# Altium PCB pcb_j.PcbDoc
Units mm, origin at the board's own origin, x right, y up, seen from the top; angles counter-clockwise.
Board outline 38.48 x 42.55 mm, 2 copper layers (Top Layer, Bottom Layer); 15 components, 15 nets, 63 pads, 0 vias.
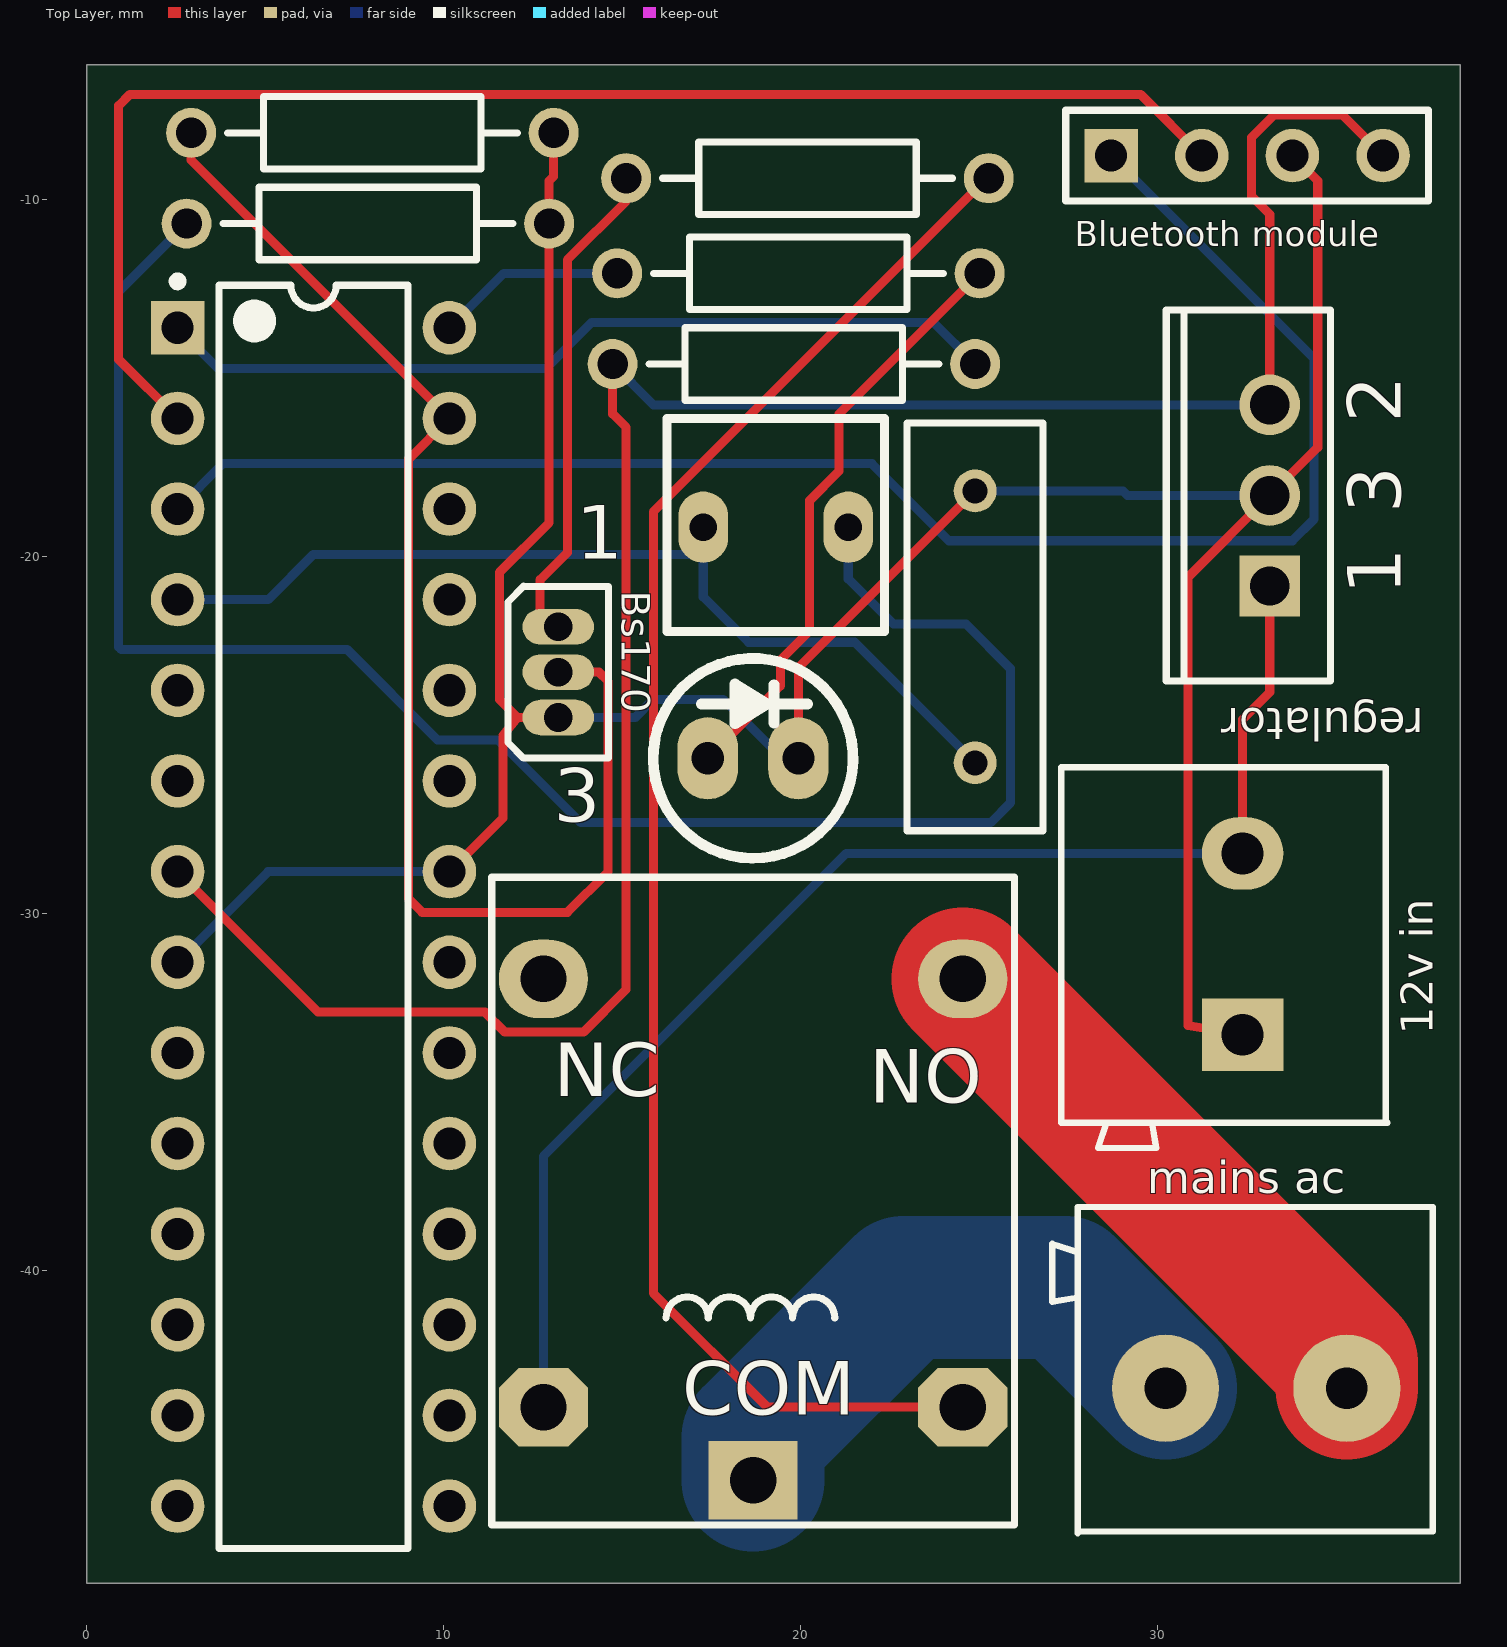
[diagram p0: Top Layer view]
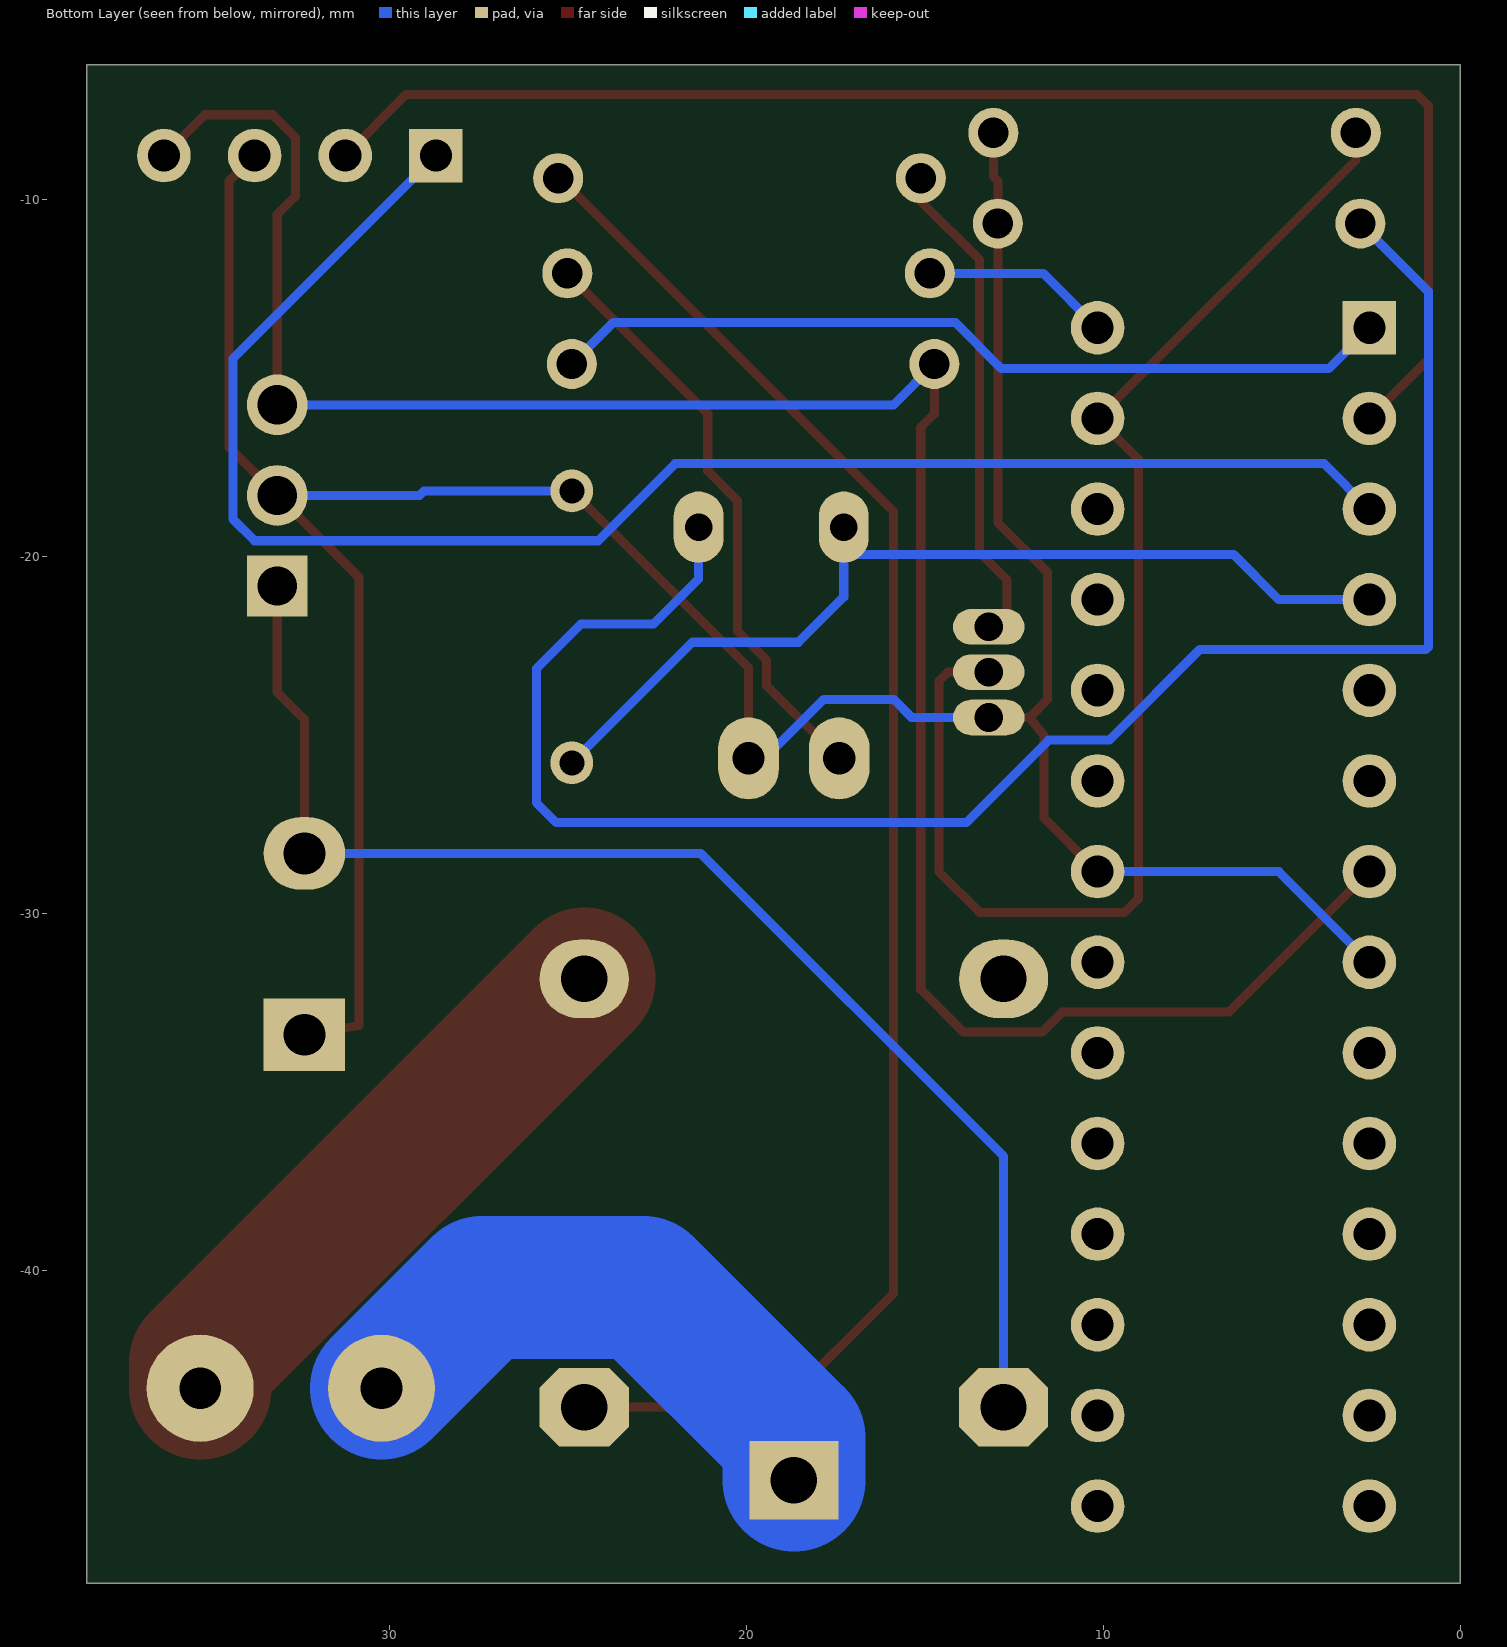
[diagram p1: Bottom Layer view, seen from below]

## Layer stack, top to bottom
Top Solder: solder mask 0.0102, Solder Resist, Dk 3.5
Top Layer: signal copper 0.0356
Dielectric 1: dielectric 0.32, FR-4, Dk 4.8
Bottom Layer: signal copper 0.0356
Bottom Solder: solder mask 0.0102, Solder Resist, Dk 3.5

## Board outline
0,-48.768 38.481,-48.768 38.481,-6.223 0,-6.223

## Design rules (kind name [scope] priority, off if disabled: settings)
Clearance [All] p1: gap=0.254 ignorepadtopadclearanceinfootprint=FALSE except(0: Arc-Hole Track-Hole SMDPad-Hole THPad-Hole Via-Hole Fill-Hole Poly-Hole Region-Hole Text-Hole)
PolygonConnect [All] p1: connectstyle=Relief reliefconductorwidth=0.254 reliefentries=4 polygonreliefangle="90 Angle" airgapwidth=0.254
RoutingVias [All] p1: holewidth=0.711 width=1.27 viastyle="Through Hole" minholewidth=0.711 minwidth=1.27 maxholewidth=0.711 maxwidth=1.27
SolderMaskExpansion [All] p1: expansion=0.102
Width Width_3 [InNet('Net5v_1')] p1: maxlimit=4 minlimit=4 preferedwidth=4
Width Width_2 [InNet('Net5v_3')] p2: maxlimit=4 minlimit=4 preferedwidth=4
Width Width_1 [All] p3: maxlimit=0.254 minlimit=0.254 preferedwidth=0.254
30 further rules are at their usual default settings.

## Classes and differential pairs
component class first_test: 5v "12v in" "Bluetooth module" Bs170 C? D1 "mains ac" R_led R_mosfet R_reset regulator S? U? ""

## Components (designator, comment, footprint, x,y, rotation, side; value= is the part's Value field where it differs from the comment)
5v "Relay" "Relay 18.85x15.35x15.70" 18.669,-38.862 r0 top
"12v in" "TBlock-2" "KF300-2 PIN"#1 32.385,-33.401 r180 top
"Bluetooth module" "Header 4" HDR1X4 28.702,-8.763 r0 top
Bs170 "MOSFET-N" E3 13.208,-23.241 r0 top (schematic designator IRF540)
C? "Cap" RAD-0.3 24.892,-21.971 r270 top value=100pF
D1 "LED2" LED_5MM 17.399,-25.654 r180 top
"mains ac" "TBlock-2" "KF300-2 PIN"#2 30.226,-43.307 r90 top
R__Button "Res2" AXIAL-0.4 7.874,-10.668 r180 top value=10k
R_led "Res2" AXIAL-0.4 19.939,-12.065 r180 top value=10K
R_mosfet "Res2" AXIAL-0.4 8.001,-8.128 r180 top value=10K
R_relay "Res2" AXIAL-0.4 20.193,-9.398 r0 top value=100
R_reset "Res2" AXIAL-0.4 19.812,-14.605 r180 top value=3.3K
regulator "L7805CV" TO220ABN 33.147,-18.288 r90 top
S? "PB-2pin" PB-2pin 22.352,-16.129 r180 top
U? "ATmega8A-PU" 28P3 6.35,-30.099 r0 top

## Footprints (in the part's own frame and the unit in brackets; to place one, negate y for a bottom-side part, rotate by r counter-clockwise, add the part's x,y. Pads: shape width x height; smd on the part's side, far side on the other; paste and mask are expansions set on the pad)
28P3 [mm] "DIP, 28-Leads, Row Spacing 7.62mm, Pitch 2.54mm, Body 34.67x7.3mm"
  rect 1.5x1.5 hole 0.9: 1(-3.81,16.51)
  round 1.5 hole 0.9: 2(-3.81,13.97) 3(-3.81,11.43) 4(-3.81,8.89) 5(-3.81,6.35) 6(-3.81,3.81) 7(-3.81,1.27) 8(-3.81,-1.27) 9(-3.81,-3.81) 10(-3.81,-6.35) 11(-3.81,-8.89) 12(-3.81,-11.43) 13(-3.81,-13.97) 14(-3.81,-16.51) 15(3.81,-16.51) 16(3.81,-13.97) 17(3.81,-11.43) 18(3.81,-8.89) 19(3.81,-6.35) 20(3.81,-3.81) 21(3.81,-1.27) 22(3.81,1.27) 23(3.81,3.81) 24(3.81,6.35) 25(3.81,8.89) 26(3.81,11.43) 27(3.81,13.97) 28(3.81,16.51)
  silkscreen extent -3.93,-17.7 2.65,17.93, body extent -3.6,-17.65 3.6,17.65, height 4.58
AXIAL-0.4 [mm] "Axial Device, Thru-Hole; 2 Leads; 0.4 in Pin Spacing"
  round 1.4 hole 0.85: 1(-5.08,0) 2(5.08,0)
  silkscreen extent -4.06,-1.02 4.06,1.02
E3 [mm] "TO, Flat Index; 3 In-Line, Axial Leads; Body Dia. 4.6mm; Lead Dia. 0.5 mm (max)"
  oval 2x1 hole 0.8: 1(0,1.27) 2(0,0) 3(0,-1.27)
  silkscreen extent -1.41,-2.41 1.41,2.41
HDR1X4 [mm] "Connector; Header; 4 Position"
  rect 1.5x1.5 hole 0.9: 1(0,0)
  round 1.5 hole 0.9: 2(2.54,0) 3(5.08,0) 4(7.62,0)
  silkscreen extent -1.27,-1.27 8.89,1.27
"KF300-2 PIN"#1 [mil]
  rect 90x80 hole 46: 1(0,0)
  oval 90x80 hole 46: 2(0,-200)
  silkscreen extent -160,-295 200,125, body extent -157,-295 200,127, height 493
"KF300-2 PIN"#2 [mil]
  round 118.11 hole 46: 1(0,0) 2(0,-200)
  silkscreen extent -160,-295 200,125, body extent -157,-295 200,127, height 493
LED_5MM [mm]
  oval 1.7x2.3 hole 0.9: 1(0,0) 2(-2.54,0)
  silkscreen extent -4.07,-2.8 1.53,2.8
PB-2pin [mil] "Switch"
  oval 55.12x78.74 hole 30: 1(40,120) 2(200,120)
  silkscreen extent 0,0 240,235
RAD-0.3 [mm] "Radial Cap, Thru-Hole; 2 Leads; 0.3 in Pin Spacing"
  round 1.2 hole 0.7: 1(-3.81,0) 2(3.81,0)
  silkscreen extent -5.71,-1.91 5.71,1.91
"Relay 18.85x15.35x15.70" [mm]
  rect 2.5x2.2 hole 1.3: 1(0,-7.025)
  oval 2.5x2.2 hole 1.3: 2(-5.875,7.025) 3(5.875,7.025)
  oct 2.5x2.2 hole 1.3: 4(-5.875,-4.975) 5(5.875,-4.975)
  silkscreen extent -7.33,-8.28 7.33,9.88, body extent -7.37,-8.71 7.63,9.98, height 15.7
TO220ABN [mm] "TO, Thru-Hole, Vertical, Heatsink Mounted; 3 In-Line Leads; Pitch 2.54 mm; Pin sequence 1, 3, 2"
  rect 1.7x1.7 hole 1.1: 1(-2.54,0)
  round 1.7 hole 1.1: 2(2.54,0) 3(0,0)
  silkscreen extent -5.2,-1.7 5.2,2.9

## Part data
5v: "SPDT Relay", Company=E.P.I.L, Design_Date=2011/10/31, Designer="Eng. Saeid Jorablo"
"Bluetooth module": "Header, 4-Pin", LatestRevisionDate=17-Jul-2002, LatestRevisionNote="Re-released for DXP Platform.", Publisher="Altium Limited"
Bs170: "N-Channel MOSFET", LatestRevisionDate=17-Jul-2002, LatestRevisionNote="Re-released for DXP Platform.", PackageDescription="TO, Flat Index; 3 In-Line, Axial Leads; Body Dia. 4.6mm; Lead Dia. 0.5 mm (max)", PackageReference=E3, PackageVersion=1995/1996, Published=8-Jun-2000, Publisher="Altium Limited"
C?: "Capacitor", LatestRevisionDate=17-Jul-2002, LatestRevisionNote="Re-released for DXP Platform.", PackageDescription="Radial Cap, Thru-Hole; 2 Leads; 0.3 in Pin Spacing", PackageReference=RAD-0.3, Published=8-Jun-2000, Publisher="Altium Limited"
D1: "Typical RED, GREEN, YELLOW, AMBER GaAs LED", LatestRevisionDate=17-Jul-2002, LatestRevisionNote="Re-released for DXP Platform.", PackageDescription="SM LED; 2 Flat Leads", PackageReference=3.2X1.6X1.1, PackageVersion=Feb-2002, Published=8-Jun-2000, Publisher="Altium Limited"
R__Button R_led R_mosfet R_relay R_reset: "Resistor", LatestRevisionDate=17-Jul-2002, LatestRevisionNote="Re-released for DXP Platform.", PackageDescription="Axial Device, Thru-Hole; 2 Leads; 0.4 in Pin Spacing", PackageReference=AXIAL-0.4, Published=8-Jun-2000, Publisher="Altium Limited"
regulator: "Positive Voltage Regulator", ComponentLink1Description="Manufacturer Link", ComponentLink1URL=http://www.st.com/, DatasheetVersion=Dec-1998, LatestRevisionDate=17-Jul-2002, LatestRevisionNote="Re-released for DXP Platform.", Note="Tab is connected to pin 3 (GND).", PackageDescription="TO, Thru-Hole, Vertical, Heatsink Mounted; 3 In-Line Leads; Pitch 2.54 mm; Pin sequence 1, 3, 2", PackageReference=TO220ABN, PackageVersion=Jun-1998, Published=24-Aug-2001, Publisher="Altium Limited"
S?: "Switch", Designer="Seyed Mohsen Ghasemian", E-mail=picpars@gmail.com, Publisher=www.picpars.com, WEB=www.picpars.com
U?: "8-bit AVR Microcontroller, 8KB Flash, 512 Bytes EEPROM, 1KB SRAM, 28-pin PDIP, Industrial Grade (-40°C to 85°C)", Supplier Part Number 1=ATMEGA8A-PU-ND, ComponentLink1Description="Manufacturer Link", ComponentLink1URL=http://www.atmel.com/products/avr/default.asp?, ComponentLink2Description="ATmega8A Datasheet", ComponentLink2URL=http://www.atmel.com/dyn/resources/prod_documents/doc8159.pdf, ComponentLink3Description="ATmega8A Summary", ComponentLink3URL=http://www.atmel.com/dyn/resources/prod_documents/8159S.pdf, ComponentLink4Description="Atmel.com Home", ComponentLink4URL=http://www.atmel.com, DatasheetVersion="revC, Jul-2009", PackageDescription="28-lead (0.300\"/7.62mm Wide) Plastic Dual Inline Package (PDIP)", PackageReference=28P3, PackageVersion="revB, Sep-2001", Published=1-Apr-2010, Publisher="Altium Limited", Supplier 1=Digi-Key, Supplier 2=Farnell, Supplier 3=Mouser, Supplier Part Number 2=1748534, Supplier Part Number 3=556-ATMEGA8A-PU

## Nets (pads, with @x,y where several pads share a name; then routed paths per layer and width w, separated by ;. In a path a pad name is that pad's centre, name@x,y a point inside that pad or via, vN(x,y) a via of type N, cw(c..) or ccw(c..) an arc to the next point about the centre after c; other vN are vias at no path point)
GND: "12v in.1" "Bluetooth module.3" Bs170.3 C?.1 D1.2 R__Button.1 R_mosfet.1 regulator.3 U?.8 U?.22 | length 85.3
  Top Layer w0.254: U?.22 11.659,-27.33 11.659,-25.019 12.065,-24.511 ; R_mosfet.1 13.081,-9.347 12.954,-9.474 R__Button.1 12.954,-19.05 11.557,-20.447 11.557,-24.003 12.065,-24.511 ; Bs170.3 12.065,-24.511 ; D1.2 19.939,-23.114 C?.1 ; 32.385,-33.401 30.861,-33.147 30.861,-20.574 regulator.3 34.493,-16.942 34.493,-9.474 33.782,-8.763
  Bottom Layer w0.254: U?.8 5.08,-28.829 U?.22 ; Bs170.3 15.367,-24.511 15.875,-24.003 17.831,-24.003 19.482,-25.654 D1.2 ; C?.1 29.032,-18.161 29.159,-18.288 regulator.3
Net5v_1: 5v.1 "mains ac.1" | length 15.7
  Bottom Layer w4: 5v.1 18.669,-44.704 22.89,-40.483 27.402,-40.483 30.226,-43.307
Net5v_3: 5v.3 "mains ac.2" | length 15.9
  Top Layer w4: 5v.3 35.306,-42.599 35.306,-43.307
Net5v_4: 5v.4 "12v in.2" regulator.1 | length 37.9
  Top Layer w0.254: 32.385,-28.321 32.385,-24.562 33.147,-23.8 regulator.1
  Bottom Layer w0.254: 5v.4 12.794,-36.812 21.285,-28.321 32.385,-28.321
Net5v_5: 5v.5 R_relay.2 | length 45.2
  Top Layer w0.254: 5v.5 19.072,-43.837 15.875,-40.64 15.875,-18.745 25.222,-9.398 R_relay.2
"NetBluetooth module_1": "Bluetooth module.1" U?.3 | length 46.1
  Bottom Layer w0.254: U?.3 3.81,-17.399 21.996,-17.399 24.155,-19.558 33.782,-19.558 34.392,-18.948 34.392,-14.453 28.702,-8.763
"NetBluetooth module_2": "Bluetooth module.2" U?.2 | length 40.6
  Top Layer w0.254: U?.2 0.889,-14.478 0.889,-7.366 1.208,-7.047 29.526,-7.047 31.242,-8.763
NetC?_2: C?.2 S?.2 U?.4 | length 26.8
  Bottom Layer w0.254: U?.4 5.08,-21.209 6.35,-19.939 S?.2@17.272,-19.939 ; S?.2 S?.2@17.272,-19.939 ; C?.2 21.514,-22.403 18.542,-22.403 17.272,-21.133 S?.2@17.272,-19.939
NetD1_1: D1.1 R_led.1 | length 16.7
  Top Layer w0.254: D1.1 19.431,-23.622 19.431,-22.904 20.255,-22.08 20.255,-18.429 21.082,-17.602 21.082,-16.002 R_led.1
NetIRF540_1: Bs170.1 R_relay.1 | length 14.1
  Top Layer w0.254: Bs170.1 12.7,-21.971 12.7,-20.65 13.462,-19.888 13.462,-11.689 15.113,-10.038 R_relay.1
NetIRF540_2: Bs170.2 R_mosfet.2 U?.27 | length 38
  Top Layer w0.254: R_mosfet.2 2.921,-8.89 U?.27 9.017,-17.272 9.017,-29.591 9.398,-29.972 13.462,-29.972 14.605,-28.829 14.605,-23.495 14.351,-23.241 Bs170.2
NetR__Button_2: R__Button.2 S?.1 | length 50.7
  Bottom Layer w0.254: R__Button.2 0.889,-12.573 0.889,-22.53 0.965,-22.606 7.29,-22.606 9.83,-25.146 11.532,-25.146 13.843,-27.457 25.324,-27.457 25.883,-26.899 25.883,-23.139 24.638,-21.895 22.606,-21.895 21.336,-20.625 S?.1
NetR_led_2: R_led.2 U?.28 | length 5.3
  Bottom Layer w0.254: U?.28 11.684,-12.065 R_led.2
NetR_reset_1: R_reset.1 U?.1 | length 23.8
  Bottom Layer w0.254: U?.1 3.683,-14.732 12.852,-14.732 14.148,-13.437 23.724,-13.437 R_reset.1
VCC: "Bluetooth module.4" R_reset.2 regulator.2 U?.7 | length 63.6
  Top Layer w0.254: U?.7 6.477,-32.766 11.151,-32.766 11.709,-33.325 13.919,-33.325 15.113,-32.131 15.113,-16.383 14.732,-16.002 R_reset.2 ; regulator.2 33.147,-10.414 32.639,-9.906 32.639,-8.255 33.274,-7.62 35.179,-7.62 36.322,-8.763
  Bottom Layer w0.254: R_reset.2 15.875,-15.748 regulator.2
pads on no net: 5v.2 U?.5 U?.6 U?.9 U?.10 U?.11 U?.12 U?.13 U?.14 U?.15 U?.16 U?.17 U?.18 U?.19 U?.20 U?.21 U?.23 U?.24 U?.25 U?.26

## Text inside footprints (layer, text, board x,y; h text height)
5v: Top Overlay "NC" at 13.081,-35.128 h1.5; Top Overlay "NO" at 21.92,-35.306 h1.5; Top Overlay "COM" at 16.688,-44.044 h1.5
Bs170: Top Overlay "3" at 13.081,-27.432 h1.5; Top Overlay "1" at 13.716,-20.066 h1.5
regulator: Top Overlay "1" at 36.822,-21.078 h1.5 r90; Top Overlay "2" at 36.822,-16.248 h1.5 r90; Top Overlay "3" at 36.822,-18.788 h1.5 r90